# Altium PCB HALL_SENSORS_PCB.PcbDoc
Units mil, origin at the board's own origin, x right, y up, seen from the top; angles counter-clockwise.
Board outline 6250 x 290 mil, 2 copper layers (Top Layer, Bottom Layer); 106 components, 68 nets, 462 pads, 0 vias.
Unrouted connection lines stored in the file: 394.
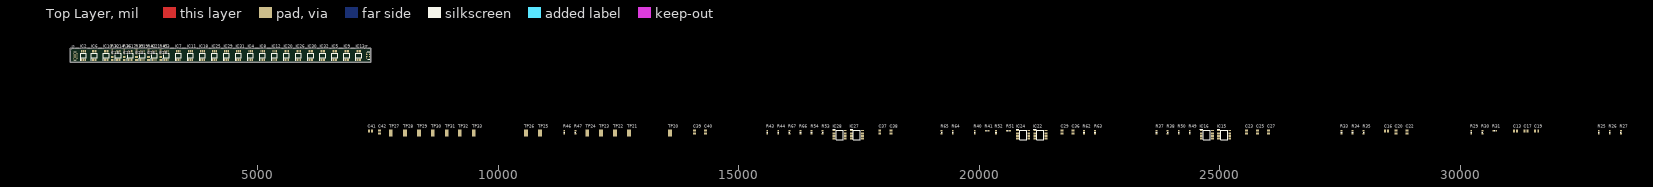
[diagram p0: Top Layer view]
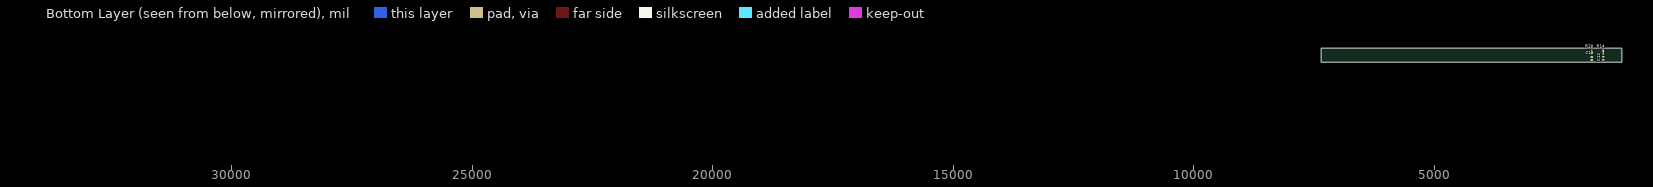
[diagram p1: Bottom Layer view, seen from below]

## Layer stack, top to bottom
Top Solder: solder mask 0.4, Solder Resist, Dk 3.5
Top Layer: signal copper 1.4
Dielectric 1: dielectric 12.6, FR-4, Dk 4.8
Bottom Layer: signal copper 1.4
Bottom Solder: solder mask 0.4, Solder Resist, Dk 3.5

## Board outline
1100,2710 7350,2710 7350,3000 1100,3000

## Design rules (kind name [scope] priority, off if disabled: settings)
Clearance [All] p1: gap=10 ignorepadtopadclearanceinfootprint=FALSE except(0: Arc-Hole Track-Hole SMDPad-Hole THPad-Hole Via-Hole Fill-Hole Poly-Hole Region-Hole Text-Hole)
PolygonConnect [All] p1: connectstyle=Relief reliefconductorwidth=10 reliefentries=4 polygonreliefangle="90 Angle" airgapwidth=10
RoutingVias [All] p1: holewidth=28 width=50 viastyle="Through Hole" minholewidth=28 minwidth=50 maxholewidth=28 maxwidth=50
SolderMaskExpansion [All] p1: expansion=4 istentingtop=FALSE
Width [All] p1: maxlimit=10 minlimit=10 preferedwidth=10
30 further rules are at their usual default settings.

## Components (designator, comment, footprint, x,y, rotation, side; value= is the part's Value field where it differs from the comment)
C12 "0.01uF" CAPC2012X88N 1487,2792 r270 bottom
C13 "0.01uF" CAPC2012X88N 31155,1280 r0 top
C15 "0.01uF" CAPC2012X88N 1725,2790 r270 bottom
C16 "0.01uF" CAPC2012X88N 28470,1280 r0 top
C17 "0.01uF" CAPC2012X88N 31375,1280 r0 top
C18 "0.01uF" CAPC2012X88N 1975,2790 r270 top
C19 "0.01uF" CAPC2012X88N 31595,1280 r0 top
C20 "0.01uF" CAPC2012X88N 28670,1260 r90 top
C21 "0.01uF" CAPC2012X88N 2225,2790 r270 top
C22 "0.01uF" CAPC2012X88N 28900,1260 r90 top
C23 "0.01uF" CAPC2012X88N 25560,1260 r90 top
C24 "0.01uF" CAPC2012X88N 2480,2790 r270 top
C25 "0.01uF" CAPC2012X88N 25790,1260 r90 top
C26 "0.01uF" CAPC2012X88N 2730,2790 r270 top
C27 "0.01uF" CAPC2012X88N 26020,1260 r90 top
C28 "0.01uF" CAPC2012X88N 2980,2790 r270 top
C29 "0.01uF" CAPC2012X88N 21725,1260 r90 top
C36 "0.01uF" CAPC2012X88N 21955,1260 r90 top
C37 "0.01uF" CAPC2012X88N 17935,1260 r90 top
C38 "0.01uF" CAPC2012X88N 18165,1260 r90 top
C39 "0.01uF" CAPC2012X88N 14080,1260 r90 top
C40 "0.01uF" CAPC2012X88N 14310,1260 r90 top
C41 "0.01uF" CAPC2012X88N 7340,1280 r0 top
C42 "0.01uF" CAPC2012X88N 7530,1260 r90 top
IC2 "TMAG5170A1QDGKR" SOP65P490X110-8N 1375,2850 r90 top
IC3 "TMAG5170A1QDGKR" SOP65P490X110-8N 3100,2850 r90 top
IC4 "TMAG5170A1QDGKR" SOP65P490X110-8N 4850,2850 r90 top
IC5 "TMAG5170A1QDGKR" SOP65P490X110-8N 6600,2850 r90 top
IC6 "TMAG5170A1QDGKR" SOP65P490X110-8N 1600,2850 r90 top
IC7 "TMAG5170A1QDGKR" SOP65P490X110-8N 3350,2850 r90 top
IC8 "TMAG5170A1QDGKR" SOP65P490X110-8N 5100,2850 r90 top
IC9 "TMAG5170A1QDGKR" SOP65P490X110-8N 6850,2850 r90 top
IC10 "TMAG5170A1QDGKR" SOP65P490X110-8N 1850,2850 r90 top
IC11 "TMAG5170A1QDGKR" SOP65P490X110-8N 3600,2850 r90 top
IC12 "TMAG5170A1QDGKR" SOP65P490X110-8N 5350,2850 r90 top
IC13 "TMAG5170A1QDGKR" SOP65P490X110-8N 7100,2850 r90 top
IC14 "TMAG5170A1QDGKR" SOP65P490X110-8N 2100,2850 r90 top
IC15 "M74HC595YTTR" SOP65P640X120-16N 25095,1200 r0 top
IC16 "M74HC595YTTR" SOP65P640X120-16N 24735,1200 r0 top
IC17 "TMAG5170A1QDGKR" SOP65P490X110-8N 2350,2850 r90 top
IC18 "TMAG5170A1QDGKR" SOP65P490X110-8N 3850,2850 r90 top
IC19 "TMAG5170A1QDGKR" SOP65P490X110-8N 2600,2850 r90 top
IC20 "TMAG5170A1QDGKR" SOP65P490X110-8N 5600,2850 r90 top
IC21 "TMAG5170A1QDGKR" SOP65P490X110-8N 2850,2850 r90 top
IC22 "M74HC595YTTR" SOP65P640X120-16N 21275,1200 r0 top
IC24 "M74HC595YTTR" SOP65P640X120-16N 20915,1200 r0 top
IC25 "TMAG5170A1QDGKR" SOP65P490X110-8N 4100,2850 r90 top
IC26 "TMAG5170A1QDGKR" SOP65P490X110-8N 5850,2850 r90 top
IC27 "M74HC595YTTR" SOP65P640X120-16N 17460,1200 r0 top
IC28 "M74HC595YTTR" SOP65P640X120-16N 17100,1200 r0 top
IC29 "TMAG5170A1QDGKR" SOP65P490X110-8N 4350,2850 r90 top
IC30 "TMAG5170A1QDGKR" SOP65P490X110-8N 6100,2850 r90 top
IC31 "TMAG5170A1QDGKR" SOP65P490X110-8N 4600,2850 r90 top
IC32 "TMAG5170A1QDGKR" SOP65P490X110-8N 6350,2850 r90 top
J? "BM46B-12DS-0.35V_53_" BM46B12DS035V53 1200,2838.78 r90 top
J? "BM46B-12DP-0.35V_53_" BM46B12DP035V53 7300,2850 r90 top
R14 "10K" RESC1608X55N 1487,2924 r90 bottom
R25 "10K" RESC1608X55N 32885,1255 r90 top
R26 "10K" RESC1608X55N 33115,1255 r90 top
R27 "10K" RESC1608X55N 33345,1255 r90 top
R28 "10K" RESC1608X55N 1725,2920 r90 bottom
R29 "10K" RESC1608X55N 30235,1255 r90 top
R30 "10K" RESC1608X55N 30465,1255 r90 top
R31 "10K" RESC1608X55N 30725,1285 r0 top
R32 "10K" RESC1608X55N 1975,2920 r90 top
R33 "10K" RESC1608X55N 27535,1255 r90 top
R34 "10K" RESC1608X55N 27765,1255 r90 top
R35 "10K" RESC1608X55N 27995,1255 r90 top
R36 "10K" RESC1608X55N 2225,2920 r90 top
R37 "10K" RESC1608X55N 23690,1255 r90 top
R38 "10K" RESC1608X55N 23920,1255 r90 top
R39 "10K" RESC1608X55N 2480,2920 r90 top
R40 "10K" RESC1608X55N 19910,1255 r90 top
R41 "10K" RESC1608X55N 20170,1285 r0 top
R42 "10K" RESC1608X55N 2730,2925 r90 top
R43 "10K" RESC1608X55N 15595,1255 r90 top
R44 "10K" RESC1608X55N 15825,1255 r90 top
R45 "10K" RESC1608X55N 2980,2920 r90 top
R46 "10K" RESC1608X55N 11375,1255 r90 top
R47 "10K" RESC1608X55N 11605,1255 r90 top
R49 "0R" RESC1608X55N 24380,1255 r90 top
R50 "0R" RESC1608X55N 24150,1255 r90 top
R51 "0R" RESC1608X55N 20610,1285 r0 top
R52 "0R" RESC1608X55N 20350,1255 r90 top
R53 "0R" RESC1608X55N 16745,1255 r90 top
R54 "0R" RESC1608X55N 16515,1255 r90 top
R62 "0R" RESC1608X55N 22180,1255 r90 top
R63 "0R" RESC1608X55N 22410,1255 r90 top
R64 "0R" RESC1608X55N 19450,1255 r90 top
R65 "0R" RESC1608X55N 19220,1255 r90 top
R66 "0R" RESC1608X55N 16285,1255 r90 top
R67 "0R" RESC1608X55N 16055,1255 r90 top
TP20 "5019" KSTN-5019_V 13570,1240 r90 top
TP21 "5019" KSTN-5019_V 12720,1240 r90 top
TP22 "5019" KSTN-5019_V 12430,1240 r90 top
TP23 "5019" KSTN-5019_V 12140,1240 r90 top
TP24 "5019" KSTN-5019_V 11850,1240 r90 top
TP25 "5019" KSTN-5019_V 10870,1240 r90 top
TP26 "5019" KSTN-5019_V 10580,1240 r90 top
TP27 "5019" KSTN-5019_V 7765,1240 r90 top
TP28 "5019" KSTN-5019_V 8060,1240 r90 top
TP29 "5019" KSTN-5019_V 8350,1240 r90 top
TP30 "5019" KSTN-5019_V 8640,1240 r90 top
TP31 "5019" KSTN-5019_V 8930,1240 r90 top
TP32 "5019" KSTN-5019_V 9200,1240 r90 top
TP33 "5019" KSTN-5019_V 9490,1240 r90 top

## Footprints (in the part's own frame and the unit in brackets; to place one, negate y for a bottom-side part, rotate by r counter-clockwise, add the part's x,y. Pads: shape width x height; smd on the part's side, far side on the other; paste and mask are expansions set on the pad)
BM46B12DP035V53 [mm]
  rect 0.18x0.755 smd: 1(-0.875,-0.772) 2(-0.875,0.772) 3(-0.525,-0.772) 4(-0.525,0.772) 5(-0.175,-0.772) 6(-0.175,0.772) 7(0.175,-0.772) 8(0.175,0.772) 9(0.525,-0.772) 10(0.525,0.772) 11(0.875,-0.772) 12(0.875,0.772)
  rect 0.34x0.415 smd: MP1(-1.305,0.943) MP2(-1.305,-0.943) MP3(1.305,-0.943) MP4(1.305,0.943)
  silkscreen extent -1.92,-0.6 1.92,0.6, body extent -1.93,-1 1.92,1, height 0.47
BM46B12DS035V53 [mm]
  rect 0.18x0.35 smd: 1(-0.875,-0.975) 2(-0.875,0.975) 3(-0.525,-0.975) 4(-0.525,0.975) 5(-0.175,-0.975) 6(-0.175,0.975) 7(0.175,-0.975) 8(0.175,0.975) 9(0.525,-0.975) 10(0.525,0.975) 11(0.875,-0.975) 12(0.875,0.975)
  rect 0.41x0.18 smd: MP1(-0.855,0) MP2(-0.285,0) MP3(0.285,0) MP4(0.855,0)
  rect 0.425x0.33 smd: MP5(-2.128,0.575) MP6(-2.128,-0.575) MP7(2.127,-0.575) MP8(2.127,0.575)
  rect 0.525x0.35 smd: MP9(1.398,0.975) MP10(-1.398,0.975) MP11(-1.398,-0.975) MP12(1.398,-0.975)
  silkscreen extent -2.24,-0.2 2.24,0.2, body extent -2.31,-1.13 2.31,1.13, height 0.8
CAPC2012X88N [mm]
  rect 1.02x1.47 smd: 1(-0.8,0) 2(0.8,0)
  body extent -1.1,-0.73 1.1,0.72, height 0.88
KSTN-5019_V [mm] "Test Point, 1-Leads, Body 3.81x2.03mm"
  rect 3.8x2.03 smd: 1(0,0)
  body extent -1.9,-1.01 1.9,1.02, height 2.29
RESC1608X55N [mm]
  rect 0.9x0.95 smd: 1(-0.8,0) 2(0.8,0)
  silkscreen extent 0,-0.3 0,0.3, body extent -0.8,-0.4 0.8,0.4, height 0.55
SOP65P490X110-8N [mm]
  rect 1.4x0.45 smd: 1(-2.2,0.975) 2(-2.2,0.325) 3(-2.2,-0.325) 4(-2.2,-0.975) 5(2.2,-0.975) 6(2.2,-0.325) 7(2.2,0.325) 8(2.2,0.975)
  silkscreen extent -2.9,-1.5 1.15,1.55, body extent -2.45,-1.5 2.45,1.5, height 1.1
SOP65P640X120-16N [mm]
  rect 1.475x0.45 smd: 1(-2.938,2.275) 2(-2.938,1.625) 3(-2.938,0.975) 4(-2.938,0.325) 5(-2.938,-0.325) 6(-2.938,-0.975) 7(-2.938,-1.625) 8(-2.938,-2.275) 9(2.938,-2.275) 10(2.938,-1.625) 11(2.938,-0.975) 12(2.938,-0.325) 13(2.938,0.325) 14(2.938,0.975) 15(2.938,1.625) 16(2.938,2.275)
  silkscreen extent -3.67,-2.5 1.85,2.85, body extent -3.2,-2.5 3.2,2.5, height 1.2

## Part data
C12 C13 C15 C16 C17 C18 C19 C20 C21 C22 C23 C24 C25 C26 C27 C28 C29 C36 C37 C38 C39 C40 C41 C42: library part C0805C103J5RAC7025, "Capacitor", Manufacturer_Name=KEMET, Mouser Part Number=80-C0805C103J5RACTM, Datasheet Link=https://componentsearchengine.com/Datasheets/1/C0805C103J5RAC7025.pdf, Height=0.88mm, Manufacturer_Part_Number=C0805C103J5RAC7025, Mouser Price/Stock=https://www.mouser.co.uk/ProductDetail/KEMET/C0805C103J5RAC7025?qs=OST0ycsSJhUuY%252B8klXMlUw%3D%3D
IC2 IC3 IC4 IC5 IC6 IC7 IC8 IC9 IC10 IC11 IC12 IC13 IC14 IC17 IC18 IC19 IC20 IC21 IC25 IC26 IC29 IC30 IC31 IC32: "Integrated Circuit", Manufacturer_Name="Texas Instruments", Mouser Part Number=595-TMAG5170A1QDGKR, Arrow Part Number=TMAG5170A1QDGKR, Arrow Price/Stock=https://www.arrow.com/en/products/tmag5170a1qdgkr/texas-instruments?region=nac, Datasheet Link=https://www.ti.com/lit/ds/symlink/tmag5170.pdf?ts=1631468164599&ref_url=https%253A%252F%252Fwww.ti.com%252Fsitesearch%252Fdocs%252Funiversalsearch.tsp%253FlangPref%253Den-US%2526searchTerm%253DTMAG5170A1QDGKR%2526nr%253D4, Height=1.1mm, Manufacturer_Part_Number=TMAG5170A1QDGKR, Mouser Price/Stock=https://www.mouser.co.uk/ProductDetail/Texas-Instruments/TMAG5170A1QDGKR?qs=7D1LtPJG0i2KumggWL5Glw%3D%3D
IC15 IC16 IC22 IC24 IC27 IC28: "Integrated Circuit", Manufacturer_Name=STMicroelectronics, Mouser Part Number=511-M74HC595YTTR, Arrow Part Number=M74HC595YTTR, Arrow Price/Stock=https://www.arrow.com/en/products/m74hc595yttr/stmicroelectronics, Datasheet Link=https://componentsearchengine.com/Datasheets/1/M74HC595YTTR.pdf, Height=1.2mm, Manufacturer_Part_Number=M74HC595YTTR, Mouser Price/Stock=https://www.mouser.co.uk/ProductDetail/STMicroelectronics/M74HC595YTTR?qs=WHlX%252B%252B9%2FRwCpo6YE5YKRQQ%3D%3D
J?: "Connector", Manufacturer_Name=Hirose, Manufacturer_Part_Number=BM46B-12DS-0.35V(53), Mouser Part Number=798-BM46B-12DS035V53, Datasheet Link=https://componentsearchengine.com/Datasheets/1/BM46B-12DS-0.35V(53).pdf, Height=0.7mm, Mouser Price/Stock=https://www.mouser.co.uk/ProductDetail/Hirose-Connector/BM46B-12DS-0.35V53?qs=Cb2nCFKsA8owNdPkaYVvTg%3D%3D
J?: "Connector", Manufacturer_Name=Hirose, Manufacturer_Part_Number=BM46B-12DP-0.35V(53), Mouser Part Number=798-BM46B-12DP035V53, Datasheet Link=https://componentsearchengine.com/Datasheets/2/BM46B-12DP-0.35V(53).pdf, Height=0.57mm, Mouser Price/Stock=https://www.mouser.co.uk/ProductDetail/Hirose-Connector/BM46B-12DP-0.35V53?qs=Cb2nCFKsA8r3RzUEkg7NDQ%3D%3D
R14 R25 R26 R27 R28 R29 R30 R31 R32 R33 R34 R35 R36 R37 R38 R39 R40 R41 R42 R43 R44 R45 R46 R47 R49 R50 R51 R52 R53 R54 R62 R63 R64 R65 R66 R67: library part RK73B1JTTD103J, "Resistor", Manufacturer_Name="KOA Speer", Mouser Part Number=660-RK73B1JTTD103J, Arrow Part Number=RK73B1JTTD103J, Arrow Price/Stock=https://www.arrow.com/en/products/rk73b1jttd103j/koa-speer-electronics?region=asia, Datasheet Link=http://www.koaspeer.com/catimages/Products/RK73-RT/RK73-RT.pdf, Height=0.55mm, Manufacturer_Part_Number=RK73B1JTTD103J, Mouser Price/Stock=https://www.mouser.co.uk/ProductDetail/KOA-Speer/RK73B1JTTD103J?qs=hmtrJ2UjXcBKRTcwO9LloQ%3D%3D
TP20 TP21 TP22 TP23 TP24 TP25 TP26 TP27 TP28 TP29 TP30 TP31 TP32 TP33: library part CMP-1672-00008-1, "Test Point, 1 Position SMD, RoHS, Tape and Reel", Package Quantity=1000, ComponentLink1Description="Manufacturer URL", ComponentLink1URL=http://www.keyelco.com/, ComponentLink2Description=Datasheet, ComponentLink2URL=http://www.keyelco.com/product-pdf.cfm?p=1357, Contact Plating=Silver, DatasheetVersion=03/2014, Mount="Surface Mount", Mounting Technology="Surface Mount", PackageDescription="1-Pin Surface Mount Device, Body 3.81 x 2.03 mm", PackageReference=5019, Packaging="Tape and Reel", Pins=1, RoHSCompliant=True

## Nets (pads, with @x,y where several pads share a name; then routed paths per layer and width w, separated by ;. In a path a pad name is that pad's centre, name@x,y a point inside that pad or via, vN(x,y) a via of type N, cw(c..) or ccw(c..) an arc to the next point about the centre after c; other vN are vias at no path point)
+3V3_S: C12.1 C13.1 C15.1 C16.1 C17.1 C18.1 C19.1 C20.1 C21.1 C22.1 C23.1 C24.1 C25.1 C26.1 C27.1 C28.1 C29.1 C36.1 C37.1 C38.1 C39.1 C40.1 C41.1 C42.1 IC2.5 IC3.5 IC4.5 IC5.5 IC6.5 IC7.5 IC8.5 IC9.5 IC10.5 IC11.5 IC12.5 IC13.5 IC14.5 IC15.16 IC16.16 IC17.5 IC18.5 IC19.5 IC20.5 IC21.5 IC22.16 IC24.16 IC25.5 IC26.5 IC27.16 IC28.16 IC29.5 IC30.5 IC31.5 IC32.5 J?.9@1238.39,2859.45 J?.10@1161.61,2859.45 J?.11@7330.39,2884.45 J?.12@7269.61,2884.45 R14.1 R25.1 R26.1 R27.1 R28.1 R29.1 R30.1 R31.1 R32.1 R33.1 R34.1 R35.1 R36.1 R37.1 R38.1 R39.1 R40.1 R41.1 R42.1 R43.1 R44.1 R45.1 R46.1 R47.1
ALERT_OE: IC16.13 IC24.13 IC28.13 J?.2@7269.61,2815.55 J?.7@1238.39,2845.67 TP26.1
ALERT_SEN1: IC2.8 IC16.15 R14.2
ALERT_SEN2: IC6.8 IC16.1 R28.2
ALERT_SEN3: IC10.8 IC16.2 R32.2
ALERT_SEN4: IC14.8 IC16.3 R36.2
ALERT_SEN5: IC16.4 IC17.8 R39.2
ALERT_SEN6: IC16.5 IC19.8 R42.2
ALERT_SEN7: IC16.6 IC21.8 R45.2
ALERT_SEN8: IC3.8 IC16.7 R25.2
ALERT_SEN9: IC7.8 IC24.15 R29.2
ALERT_SEN10: IC11.8 IC24.1 R33.2
ALERT_SEN11: IC18.8 IC24.2 R37.2
ALERT_SEN12: IC24.3 IC25.8 R40.2
ALERT_SEN13: IC24.4 IC29.8 R43.2
ALERT_SEN14: IC24.5 IC31.8 R46.2
ALERT_SEN15: IC4.8 IC24.6 R26.2
ALERT_SEN16: IC8.8 IC24.7 R30.2
ALERT_SEN17: IC12.8 IC28.15 R34.2
ALERT_SEN18: IC20.8 IC28.1 R38.2
ALERT_SEN19: IC26.8 IC28.2 R41.2
ALERT_SEN20: IC28.3 IC30.8 R44.2
ALERT_SEN21: IC28.4 IC32.8 R47.2
ALERT_SEN22: IC5.8 IC28.5 R27.2
ALERT_SEN23: IC9.8 IC28.6 R31.2
ALERT_SEN24: IC13.8 IC28.7 R35.2
CS_IN: IC15.14 IC16.14 J?.1@7330.39,2815.55
CS_OUT: IC27.9 IC28.9 J?.8@1161.61,2845.67 R66.1 R66.2 R67.1 R67.2
GND: C12.2 C13.2 C15.2 C16.2 C17.2 C18.2 C19.2 C20.2 C21.2 C22.2 C23.2 C24.2 C25.2 C26.2 C27.2 C28.2 C29.2 C36.2 C37.2 C38.2 C39.2 C40.2 C41.2 C42.2 IC2.6 IC2.7 IC3.6 IC3.7 IC4.6 IC4.7 IC5.6 IC5.7 IC6.6 IC6.7 IC7.6 IC7.7 IC8.6 IC8.7 IC9.6 IC9.7 IC10.6 IC10.7 IC11.6 IC11.7 IC12.6 IC12.7 IC13.6 IC13.7 IC14.6 IC14.7 IC15.8 IC16.8 IC17.6 IC17.7 IC18.6 IC18.7 IC19.6 IC19.7 IC20.6 IC20.7 IC21.6 IC21.7 IC22.8 IC24.8 IC25.6 IC25.7 IC26.6 IC26.7 IC27.8 IC28.8 IC29.6 IC29.7 IC30.6 IC30.7 IC31.6 IC31.7 IC32.6 IC32.7 J?.9@7330.39,2870.67 J?.10@7269.61,2870.67 J?.11@1238.39,2873.23 J?.12@1161.61,2873.23 J?.MP1 J?.MP2 J?.MP3 J?.MP4 J?.MP5 J?.MP6 J?.MP7 J?.MP8 J?.MP9 J?.MP10 J?.MP11 J?.MP12 TP27.1 TP28.1 TP29.1 TP30.1 TP31.1 TP32.1 TP33.1
NetIC15_9: IC15.9 R62.2
NetIC16_9: IC16.9 R63.2
NetIC22_9: IC22.9 R64.2
NetIC22_14: IC22.14 R62.1
NetIC24_9: IC24.9 R65.2
NetIC24_14: IC24.14 R63.1
NetIC27_14: IC27.14 R64.1
NetIC28_14: IC28.14 R65.1
REG_CLR: IC15.10 IC16.10 IC22.10 IC24.10 IC27.10 IC28.10 J?.4@7269.61,2829.33 J?.5@1238.39,2831.89 TP24.1
REG_RCK: IC15.12 IC16.12 IC22.12 IC24.12 IC27.12 IC28.12 R49.1 R50.1 R51.1 R52.1 R53.1 R54.1
REG_SCK: IC15.11 IC16.11 IC22.11 IC24.11 IC27.11 IC28.11 J?.3@7330.39,2829.33 J?.6@1161.61,2831.89 R49.2 R50.2 R51.2 R52.2 R53.2 R54.2 TP25.1
REG_SEN1: IC2.4 IC15.15
REG_SEN2: IC6.4 IC15.1
REG_SEN3: IC10.4 IC15.2
REG_SEN4: IC14.4 IC15.3
REG_SEN5: IC15.4 IC17.4
REG_SEN6: IC15.5 IC19.4
REG_SEN7: IC15.6 IC21.4
REG_SEN8: IC3.4 IC15.7
REG_SEN9: IC7.4 IC22.15
REG_SEN10: IC11.4 IC22.1
REG_SEN11: IC18.4 IC22.2
REG_SEN12: IC22.3 IC25.4
REG_SEN13: IC22.4 IC29.4
REG_SEN14: IC22.5 IC31.4
REG_SEN15: IC4.4 IC22.6
REG_SEN16: IC8.4 IC22.7
REG_SEN17: IC12.4 IC27.15
REG_SEN18: IC20.4 IC27.1
REG_SEN19: IC26.4 IC27.2
REG_SEN20: IC27.3 IC30.4
REG_SEN21: IC27.4 IC32.4
REG_SEN22: IC5.4 IC27.5
REG_SEN23: IC9.4 IC27.6
REG_SEN24: IC13.4 IC27.7
SEN_OE: IC15.13 IC22.13 IC27.13 J?.4@1161.61,2818.11 J?.5@7330.39,2843.11 TP23.1
SPI_CLK: IC2.1 IC3.1 IC4.1 IC5.1 IC6.1 IC7.1 IC8.1 IC9.1 IC10.1 IC11.1 IC12.1 IC13.1 IC14.1 IC17.1 IC18.1 IC19.1 IC20.1 IC21.1 IC25.1 IC26.1 IC29.1 IC30.1 IC31.1 IC32.1 J?.3@1238.39,2818.11 J?.6@7269.61,2843.11 TP22.1
SPI_MISO: IC2.3 IC3.3 IC4.3 IC5.3 IC6.3 IC7.3 IC8.3 IC9.3 IC10.3 IC11.3 IC12.3 IC13.3 IC14.3 IC17.3 IC18.3 IC19.3 IC20.3 IC21.3 IC25.3 IC26.3 IC29.3 IC30.3 IC31.3 IC32.3 J?.2@1161.61,2804.33 J?.7@7330.39,2856.89 TP21.1
SPI_MOSI: IC2.2 IC3.2 IC4.2 IC5.2 IC6.2 IC7.2 IC8.2 IC9.2 IC10.2 IC11.2 IC12.2 IC13.2 IC14.2 IC17.2 IC18.2 IC19.2 IC20.2 IC21.2 IC25.2 IC26.2 IC29.2 IC30.2 IC31.2 IC32.2 J?.1@1238.39,2804.33 J?.8@7269.61,2856.89 TP20.1